# Allegro board P1_SERS_PREFAC RALUCA_431C.brd
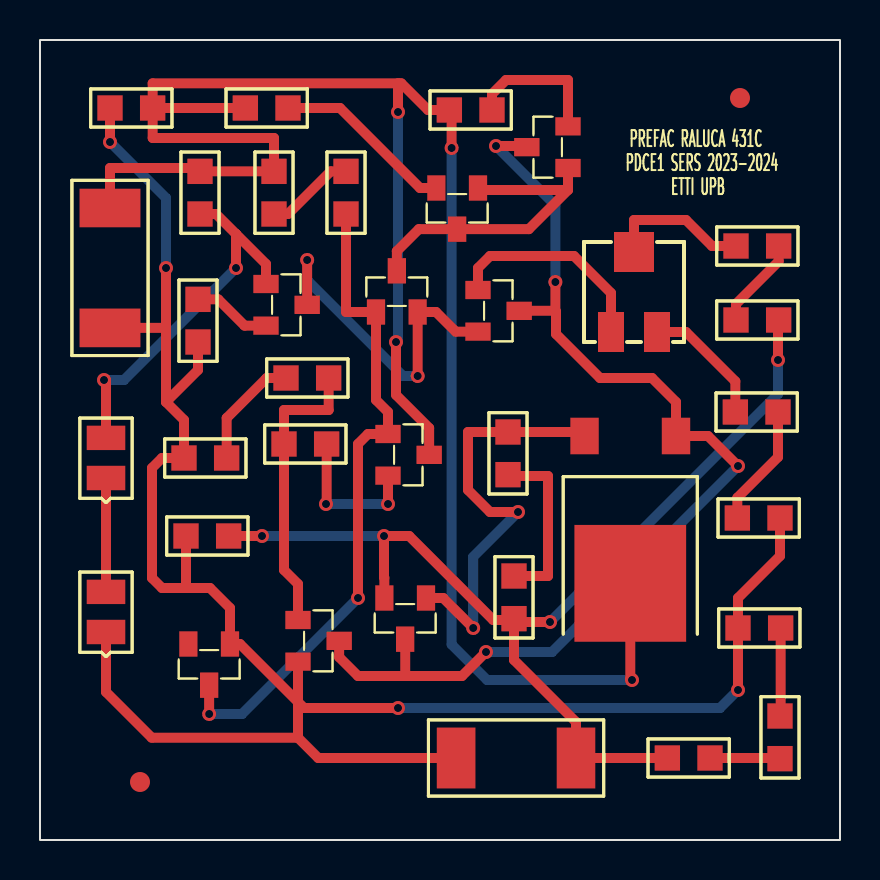
[diagram p0: board, top side]
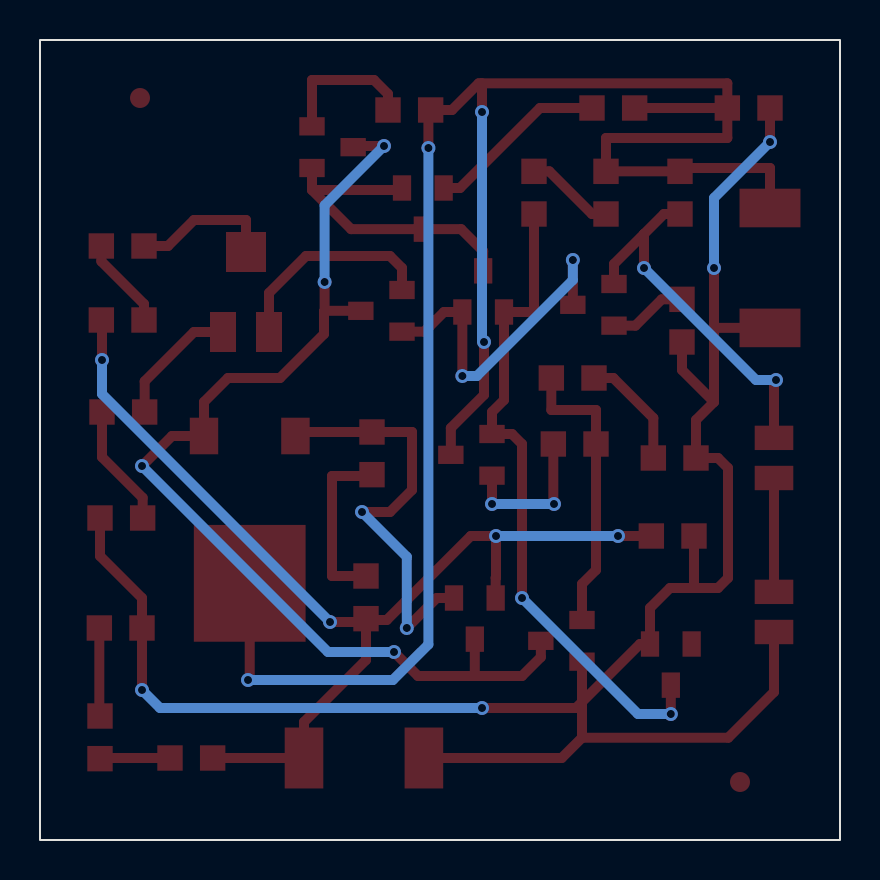
[diagram p1: board, bottom side, seen from below]

Outline 40 x 40 mm; copper layers: TOP, BOTTOM. Coordinates in mm from the lower left corner of the outline.
Outline path: rectangle 0,0 40,40

## Design rules (mm)
nets with their own width: min track width 0.5; nets GND N96167 N96255 N96307 N96313 N96319 N96419 N96427 N96491 N96527 N96605 N96633 N96675 N96849 N96879 N96905 N96915 N97017 N97063 N97151 N97183 N108178 N960470 VIN VOUT

## Placement (name value [footprint] x y rotation side)
C1  1u  [SMC0805]  3.5 36.6 0 top
C2  1u  [SMC0805]  7.3 15.2 0 top
D1  BZX84C2V7/SOT  [TO236AA]  9.5 9.8 90 top
D2  D1N4148  [SMD0805]  3.3 18.1 90 top
D3  D1N4148  [SMD0805]  3.3 10.4 90 top
J1  CON2  [SMR2512]  3.5 31.6 270 top
J2  CON2  [SMR2512]  26.8 4.1 180 top
NOREF  -  [unnamed]  35 37.1 0 top
NOREF#2  -  [#2]  -0.1 40.8 0 top
NOREF#3  -  [unnamed]  5 2.9 0 top
NOREF#4  -  [#2]  0 0 90 top
Q1  QBC856B  [TO236AA]  21.9 32.6 90 top
Q2  QBC856B  [TO236AA]  26.4 33.6 0 top
Q3  QBC846B  [TO236AA]  16.8 26.4 270 top
Q4  QBC846B  [TO236AA]  21.9 27.5 180 top
Q5  QBC846B  [TO236AA]  11.3 27.8 180 top
Q6  QMJD31C  [SMDPAK]  31.8 20.2 180 top
Q7  QBC846B  [TO236AA]  19.3 12.1 90 top
Q8  QBC846B  [TO236AA]  17.4 20.3 180 top
Q9  QBC846B  [TO236AA]  12.9 11 180 top
R1  3.3k  [SMR0805]  8 31.3 90 top
R2  510  [SMR0805]  11.7 31.3 90 top
R3  510  [SMR0805]  15.3 31.3 90 top
R4  51  [SMR0805]  12.4 36.6 180 top
R5  51  [SMR0805]  22.6 36.5 180 top
R6  51  [SMR0805]  7.9 24.9 90 top
R7  1K  [SMR0805]  12.2 19.8 0 top
R8  150  [SMR0805]  12.3 23.1 0 top
R9  150  [SMR0805]  7.2 19.1 0 top
R10  0.47  [SMR0805]  23.4 20.4 270 top
R11  1  [SMR0805]  23.7 13.2 270 top
R12  2k  [SMR0805]  34.8 26 0 top
R13  510  [SMR0805]  34.8 29.7 0 top
R14  2k  [TRIM_BI_23AL]  29.7 27.4 270 top
R15  3.3k  [SMR0805]  36.9 21.4 180 top
R16  33  [SMR0805]  37 16.1 180 top
R17  100  [SMR0805]  33.5 4.1 180 top
R18  150  [SMR0805]  37 6.2 270 top
R19  150  [SMR0805]  34.9 10.6 0 top

## Library data of the parts
C1 C2 = C
D1 = BZX84C2V7/SOT_6
D2 D3 = 1N4148_1
J1 J2 = CON2
Q1 Q2 = QBC856B_1
Q3-Q5 Q7-Q9 = QBC846B_1
Q6 = QMJD31C_8
R1-R13 R15-R19 = R_0
R14 = POT

## Footprints (pads in the part's own frame, mm; a bottom-side part is the same pattern mirrored in y, then rotated)
SMC0805
  rect 1.27x1.27 smd: 1(0,0) 2(2.134,0)
SMD0805
  rect 1.219x1.93 smd: A(2.007,0) C(0,0)
SMDPAK
  rect 1.422x1.829 smd: 1(0,0) 3(4.572,0)
  rect 5.588x5.842 smd: 4(2.286,7.366)
SMR0805
  rect 1.27x1.27 smd: 1(0,0) 2(2.134,0)
SMR2512
  rect 1.93x3.048 smd: 1(0,0) 2(5.994,0)
TO236AA
  rect 1.27x0.914 smd: 1(0,0) 2(0,2.083) 3(-2.057,1.041)
TRIM_BI_23AL
  rect 2x1.3 smd: 1(2,1.15) 2(2,-1.15)
  rect 2x2 smd: 3(-2,0)
unnamed
  round 1 smd: (0,0)

## Nets
GND: C1.1 C2.1 D1.1 D3.C(2) J1.2 J2.2 Q9.2(E) R6.1 R9.1 R16.1 R19.1
VIN: C1.2 J1.1 Q6.4 Q8.3 R1.2 R2.2 R4.2 R5.2
VOUT: C2.2 J2.1 Q7.2(E) R11.2 R12.2 R17.2
N96167: Q6.3(E) Q7.1 R10.1
N96255: Q2.3 Q4.3 Q6.1 Q7.3 Q9.3
N96307: R2.1 R3.2
N96313: Q1.2(E) R4.1
N96319: Q2.2(E) R5.1
N96419: Q1.1 Q1.3 Q2.1 Q3.3
N96427: R12.1 R13.2
N96491: D1.3 Q3.1 Q8.1 R3.1
N96527: R13.1 R14.3
N96605: Q8.2(E) R7.2
N96633: D2.A Q5.1 R1.1
N96675: R17.1 R18.2
N96849: Q4.1 R14.2(WIPER)
N96879: Q3.2(E) Q4.2(E) Q5.3
N96905: R14.1 R15.2
N96915: R18.1 R19.2
N97017: Q9.1 R7.1 R8.2
N97063: Q5.2(E) R6.2
N97151: R15.1 R16.2
N97183: R8.1 R9.2
N108178: D2.C(2) D3.A
N960470: R10.2 R11.1

Pads without a net: D1 2

## Via types
v1: diameter 0.7, hole 0.4, TOP to BOTTOM, 26 vias

## Routing (per net, layer and track width the routed paths; a pad name or vN(x,y) marks a point on that pad's centre or on a via; arc(x,y) is an arc through that point)
GND: length 104
  TOP w0.5: C2.1 7.3,12.6 ; 7.3,12.6 8.5,12.6 9.5,11.6 D1.1 10,9.8 12.9,6.9 ; 7.3,12.6 6.1,12.6 5.6,13.1 5.6,18.6 6.1,19.1 R9.1 7.2,21 6.3,21.9 ; 12.9,5.11 13.91,4.1 J2.2 ; 12.9,5.11 12.9,6.9 ; 12.9,5.11 5.59,5.11 3.3,7.4 D3.C ; v1(34.9,7.5) R19.1 34.9,12.1 37,14.2 R16.1 ; v1(17.9,6.6) 13.2,6.6 12.9,6.9 ; 12.9,6.9 Q9.2 ; v1(3.5,34.9) C1.1 ; 6.3,21.9 6.3,25.61 ; 6.3,21.9 7.9,23.5 R6.1 ; 6.3,25.61 v1(6.3,28.6) ; 6.3,25.61 J1.2
  BOTTOM w0.5: v1(34.9,7.5) 34,6.6 v1(17.9,6.6) ; v1(6.3,28.6) 6.3,32.1 v1(3.5,34.9)
VIN: length 101.6
  TOP w0.5: v1(20.58,34.6) 20.58,36.39 R5.2 19.4,36.5 18.07,37.84 17.9,37.84 ; C1.2 5.63,35.1 11.7,35.1 R2.2 R1.2 8,33.6 3.5,33.6 J1.1 ; C1.2 R4.2 ; C1.2 5.63,37.84 17.9,37.84 ; v1(17.8,24.9) 17.8,22.26 19.46,20.6 Q8.3 ; 17.9,37.84 v1(17.9,36.4) ; Q6.4 29.51,8.09 v1(29.6,8)
  BOTTOM w0.5: v1(17.9,36.4) 17.9,25 v1(17.8,24.9) ; v1(20.58,34.6) 20.58,9.78 22.36,8 v1(29.6,8)
VOUT: length 53.6
  TOP w0.5: Q7.2 17.22,13.11 17.2,13.13 v1(17.2,15.2) 18.46,15.2 22.66,11 23.7,11 ; v1(25.5,10.9) 23.7,10.9 ; 23.7,10.9 23.7,9 26.8,5.9 J2.1 R17.2 ; 23.7,10.9 23.7,11 ; 23.7,11 R11.2 ; R12.2 36.9,26 v1(36.9,24) ; C2.2 v1(11.1,15.2)
  BOTTOM w0.5: v1(25.5,10.9) 36.9,22.3 v1(36.9,24) ; v1(11.1,15.2) v1(17.2,15.2)
N96167: length 21.5
  TOP w0.5: v1(21.66,10.6) 20.16,12.1 Q7.1 ; Q6.3 27.03,20.4 R10.1 21.4,20.4 21.4,17.5 22.5,16.4 v1(23.9,16.4)
  BOTTOM w0.5: v1(23.9,16.4) 21.66,14.16 v1(21.66,10.6)
N96255: length 54.2
  TOP w0.5: 18.26,8.2 21.1,8.2 v1(22.3,9.4) ; 18.26,8.2 15.9,8.2 14.96,9.14 Q9.3 ; 18.26,8.2 18.26,10.02 18.26,10.02 Q7.3 ; Q2.3 24.28,34.7 v1(22.8,34.7) ; 25.77,26.46 25.8,26.43 25.8,25.3 28,23.1 30.6,23.1 31.8,21.9 Q6.1 33.4,20.2 v1(34.9,18.7) ; 25.77,26.46 Q4.3 ; 25.77,26.46 v1(25.77,27.9)
  BOTTOM w0.5: v1(25.77,27.9) 25.77,31.73 v1(22.8,34.7) ; v1(22.3,9.4) 25.6,9.4 v1(34.9,18.7)
N96307: length 4.5
  TOP w0.5: R3.2 14.53,33.43 12.4,31.3 R2.1
N96313: length 9.1
  TOP w0.5: Q1.2 19,32.6 15,36.6 R4.1
N96319: length 7.2
  TOP w0.5: Q2.2 26.4,38 23.3,38 22.6,37.3 R5.1
N96419: length 16.5
  TOP w0.5: Q2.1 26.4,32.5 ; 26.4,32.5 21.9,32.5 Q1.1 ; 26.4,32.5 24.44,30.54 Q1.3 18.94,30.54 17.84,29.44 Q3.3
N96427: length 4.6
  TOP w0.5: R13.2 36.93,28.93 34.8,26.8 R12.1
N96491: length 33.4
  TOP w0.5: R3.1 15.3,26.4 Q3.1 16.8,22 17.4,21.4 Q8.1 16.4,20.3 15.9,19.8 v1(15.9,12.1) ; v1(8.46,6.3) D1.3
  BOTTOM w0.5: v1(15.9,12.1) 10.1,6.3 v1(8.46,6.3)
N96527: length 7.2
  TOP w0.5: R14.3 29.7,31 32.3,31 33.6,29.7 R13.1
N96605: length 7.5
  TOP w0.5: R7.2 14.33,16.83 v1(14.3,16.8) ; v1(17.4,16.8) Q8.2
  BOTTOM w0.5: v1(17.4,16.8) v1(14.3,16.8)
N96633: length 18.9
  TOP w0.5: 9.8,30.3 8.8,31.3 R1.1 ; 9.8,30.3 v1(9.8,28.6) ; 9.8,30.3 11.3,28.8 Q5.1 ; D2.A 3.3,23 v1(3.2,23)
  BOTTOM w0.5: v1(3.2,23) 4.2,23 v1(9.8,28.6)
N96675: length 3.5
  TOP w0.5: R17.1 36.97,4.1 R18.2
N96849: length 10.7
  TOP w0.5: Q4.1 21.9,28.6 22.5,29.2 26.7,29.2 28.55,27.35 R14.2
N96879: length 17.4
  TOP w0.5: v1(18.88,23.2) Q3.2 19.8,26.4 20.78,25.42 Q4.2 ; Q5.3 v1(13.36,29)
  BOTTOM w0.5: v1(18.88,23.2) 18.16,23.2 13.36,28 v1(13.36,29)
N96905: length 6.5
  TOP w0.5: R15.2 34.77,22.93 32.3,25.4 R14.1
N96915: length 4.4
  TOP w0.5: R18.1 37.03,6.23 R19.2
N97017: length 14.6
  TOP w0.5: R8.2 14.43,21.5 12.2,21.5 R7.1 12.2,13.5 12.9,12.8 Q9.1
N97063: length 3.9
  TOP w0.5: R6.2 8.91,27.03 10.23,25.72 Q5.2
N97151: length 6.1
  TOP w0.5: R16.2 34.87,17.11 36.9,19.15 R15.1
N97183: length 5.8
  TOP w0.5: R9.2 9.33,21.1 11.33,23.1 R8.1
N108178: length 5.7
  TOP w0.5: D3.A D2.C
N960470: length 8.8
  TOP w0.5: R10.2 23.4,18.2 25.4,18.2 25.4,13.2 R11.1

## Text on the board
Ref Des/Silkscreen Top: PREFAC RALUCA 431C | ETTI UPB | PDCE1 SERS 2023-2024
XSECTION_CHART: *  SURFACE | L1 TOP CONDUCTOR | *  DIELECTRIC | L2 BOTTOM CONDUCTOR | DESIGN CROSS SECTION CHART | ___________________________ | TOTAL THICKNESS 0.26416 MM | 1-2
COMPVAL_TYPE_TOP: FIGURE | FINISHED_SIZE | 0.4 | DRILL CHART: TOP to BOTTOM | ALL UNITS ARE IN MILLIMETERS | PLATED | QTY | 26
